# EAGLE board plaque2 (EAGLE 7.2.0)
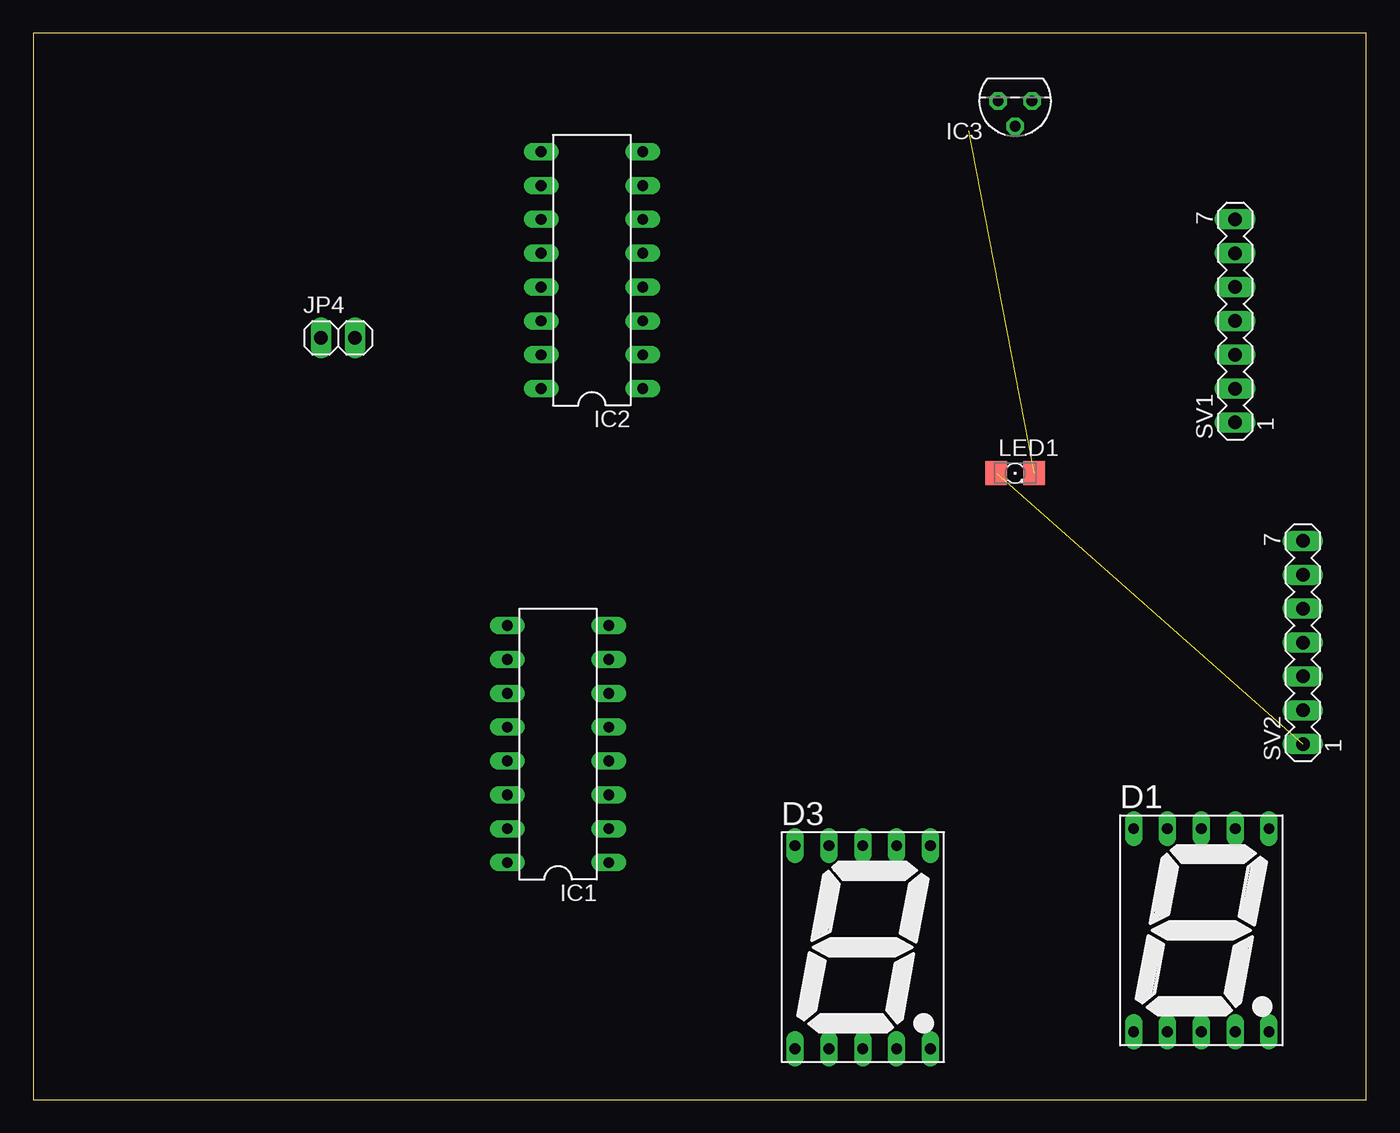
[diagram p0: board, top side]
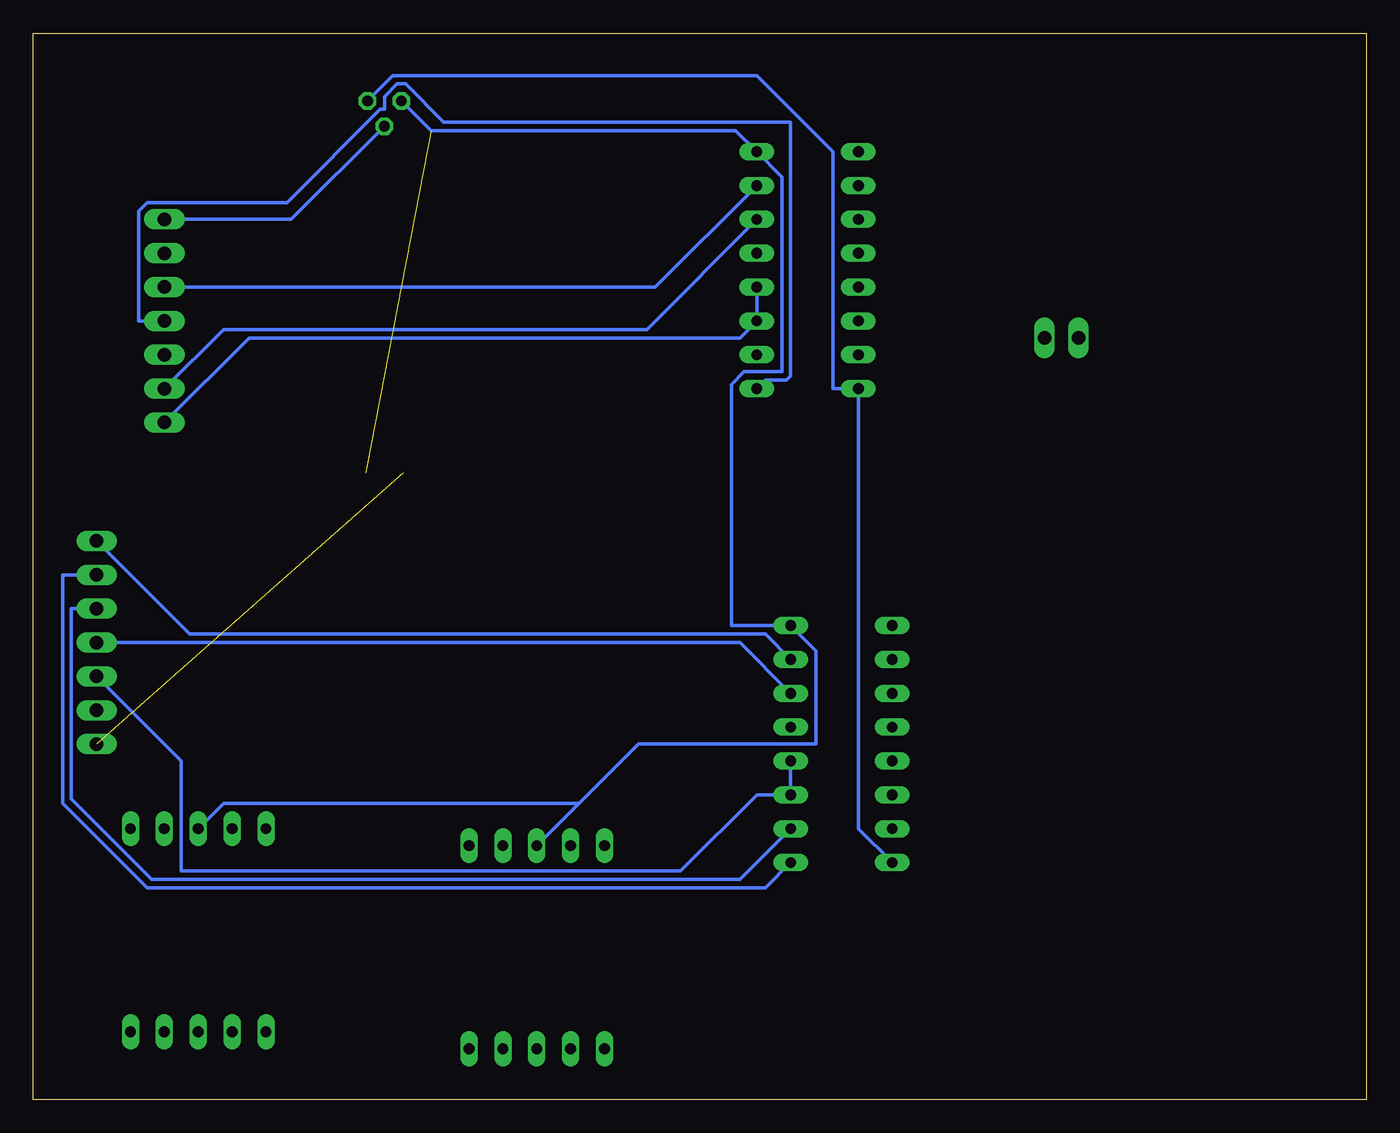
[diagram p1: board, bottom side, seen from below]

Size 100 x 80 mm. Coordinates in mm from the lower left corner, seen from the top.
Outline: 0,0 100,0 100,80 0,80 0,0
Copper layers (1*16): Top 0.035mm / dielectric 1.5mm / Bottom 0.035mm
Design rules "default": minimum track width 10mil, minimum drill 24mil, track to track 8mil, track to pad 8mil, pad to pad 8mil, via to via 8mil, smd to smd 8mil, copper to edge 40mil, drill to drill 8mil, minimum pad ring 10mil, minimum via ring 8mil, stop-mask expansion 4mil, vias tented up to drill 0mil, thermal gap 10mil

## Footprints (pad centres in the part's own frame; a part is rotated, then mirrored left to right if it is on the bottom)
7SEG-13 = drill 0.813 long: 1 -5.08,-7.62; 2 -2.54,-7.62; 3 0,-7.62; 4 2.54,-7.62; 5 5.08,-7.62; 6 5.08,7.62; 7 2.54,7.62; 8 0,7.62; 9 -2.54,7.62; 10 -5.08,7.62
DIL16 = drill 0.813 long: 1 -8.89,-3.81; 2 -6.35,-3.81; 3 -3.81,-3.81; 4 -1.27,-3.81; 5 1.27,-3.81; 6 3.81,-3.81; 7 6.35,-3.81; 8 8.89,-3.81; 9 8.89,3.81; 10 6.35,3.81; 11 3.81,3.81; 12 1.27,3.81; 13 -1.27,3.81; 14 -3.81,3.81; 15 -6.35,3.81; 16 -8.89,3.81
TO92 = drill 0.813 octagon: 1 -1.27,0; 2 0,1.905; 3 1.27,0
1X02 = drill 1.016 long: 1 -1.27,0; 2 1.27,0
LED_1206 = smd 1.6 x 1.803: A -1.422,0; C 1.422,0
MA07-1 = drill 1.016 long: 1 -7.62,0; 2 -5.08,0; 3 -2.54,0; 4 0,0; 5 2.54,0; 6 5.08,0; 7 7.62,0

## Placement (x,y rotation side)
D1  [7SEG-13]  87.63,12.7 0 top
D3  [7SEG-13]  62.23,11.43 0 top
IC1  74LS48N  [DIL16]  39.37,26.67 90 top
IC2  74LS48N  [DIL16]  41.91,62.23 90 top
IC3  LM35CZ  [TO92]  73.66,74.93 180 top
JP4  [1X02]  22.86,57.15 0 top
LED1  [LED_1206]  73.66,46.99 0 top
SV1  [MA07-1]  90.17,58.42 90 top
SV2  [MA07-1]  95.25,34.29 90 top

## Library data of the parts
D1 D3 = special
IC1 IC2 = 74xx-eu
IC3 = lm35
JP4 = pinhead
LED1 = eagle-ltspice; SPICEMODEL: NONE; SPICEPREFIX: D; SPICETYPE: diode
SV1 SV2 = con-lstb; OC_FARNELL: unknown; OC_NEWARK: unknown

## Nets
GND: D1.8 D3.8 IC1.8 IC2.8 IC3.3 LED1.C
N$1: IC3.2 SV1.7
N$2: IC2.7 SV1.5
N$3: IC2.1 SV1.4
N$4: SV1.3
N$5: IC2.6 SV1.2
N$6: IC2.3 IC2.4 SV1.1
N$7: IC2.13
N$8: IC2.12
N$9: IC2.11
N$10: IC2.10
N$11: IC2.9
N$12: IC2.15
N$13: IC2.14
N$14: IC1.7 SV2.7
N$15: IC1.1 SV2.6
N$16: IC1.2 SV2.5
N$17: IC1.6 SV2.4
N$18: IC1.3 IC1.4 SV2.3
N$19: IC1.13
N$20: IC1.12
N$21: IC1.11
N$22: IC1.10
N$23: IC1.9
N$24: IC1.15
N$25: D3.7
N$26: D3.6
N$27: IC1.14
N$28: LED1.A SV2.1
N$29: D3.4
N$30: D3.2
N$31: D3.1
N$32: D3.9
N$33: D3.10
N$34: D1.7
N$35: D1.6
N$36: D1.4
N$37: D1.2
N$38: D1.1
N$39: D1.9
N$40: D1.10
VCC: IC1.16 IC2.16 IC3.1

## Tracks (layer width: path | path; a pad name or v marks a point on that pad's centre or on a via)
GND  (1 unrouted)
  Bottom 0.254: IC3.3 70.17,72.71 47.31,72.71 IC2.8 43.81,69.22 43.81,54.61 46.67,54.61 47.62,53.66 47.62,35.56 IC1.8 41.27,33.66 41.27,26.67 54.61,26.67 59.05,22.23 | D3.8 59.05,22.23 | D1.8 85.72,22.23 59.05,22.23
N$1
  Bottom 0.254: IC3.2 80.64,66.04 SV1.7
N$2
  Bottom 0.254: IC2.7 53.34,60.96 SV1.5
N$3
  Bottom 0.254: IC2.1 45.09,53.98 43.5,53.98 43.18,54.29 43.18,73.34 69.22,73.34 72.07,76.2 72.71,76.2 73.66,75.25 73.66,74.3 73.98,74.3 80.96,67.31 91.44,67.31 92.08,66.67 92.08,58.42 SV1.4
N$5
  Bottom 0.254: IC2.6 53.98,57.78 85.72,57.78 SV1.2
N$6
  Bottom 0.254: IC2.4 IC2.3 46.99,57.15 83.82,57.15 SV1.1
N$14
  Bottom 0.254: IC1.7 45.09,34.92 88.27,34.92 SV2.7
N$15
  Bottom 0.254: IC1.1 45.09,15.88 91.44,15.88 97.79,22.23 97.79,39.37 SV2.6
N$16
  Bottom 0.254: IC1.2 46.99,16.51 91.12,16.51 97.16,22.54 97.16,36.83 SV2.5
N$17
  Bottom 0.254: IC1.6 46.99,34.29 SV2.4
N$18
  Bottom 0.254: IC1.4 IC1.3 45.72,22.86 51.44,17.14 88.9,17.14 88.9,25.4 SV2.3
N$28  (1 unrouted)
VCC
  Bottom 0.254: IC1.16 38.1,20.32 IC2.16 40.01,53.34 40.01,71.12 45.72,76.83 73.03,76.83 IC3.1